# EAGLE board slave-board (EAGLE 8.2.1)
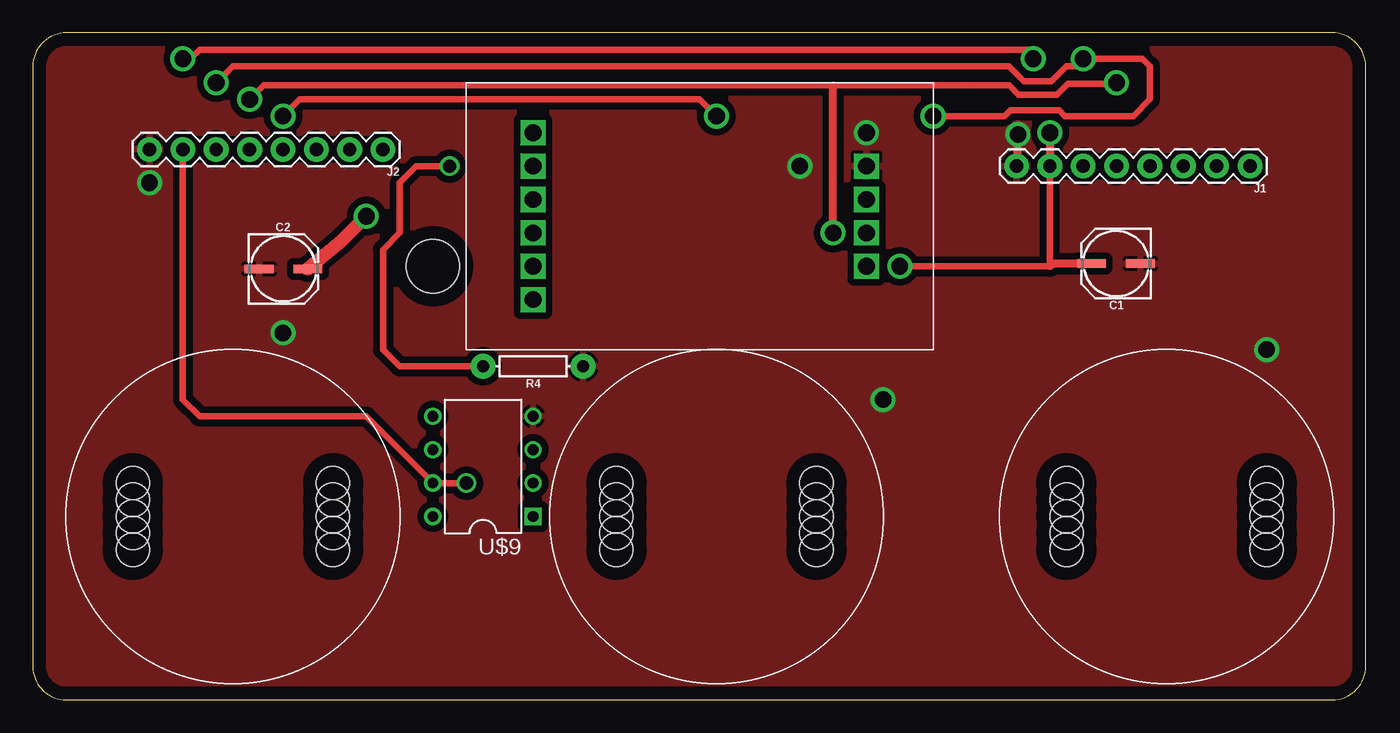
[diagram p0: board, top side]
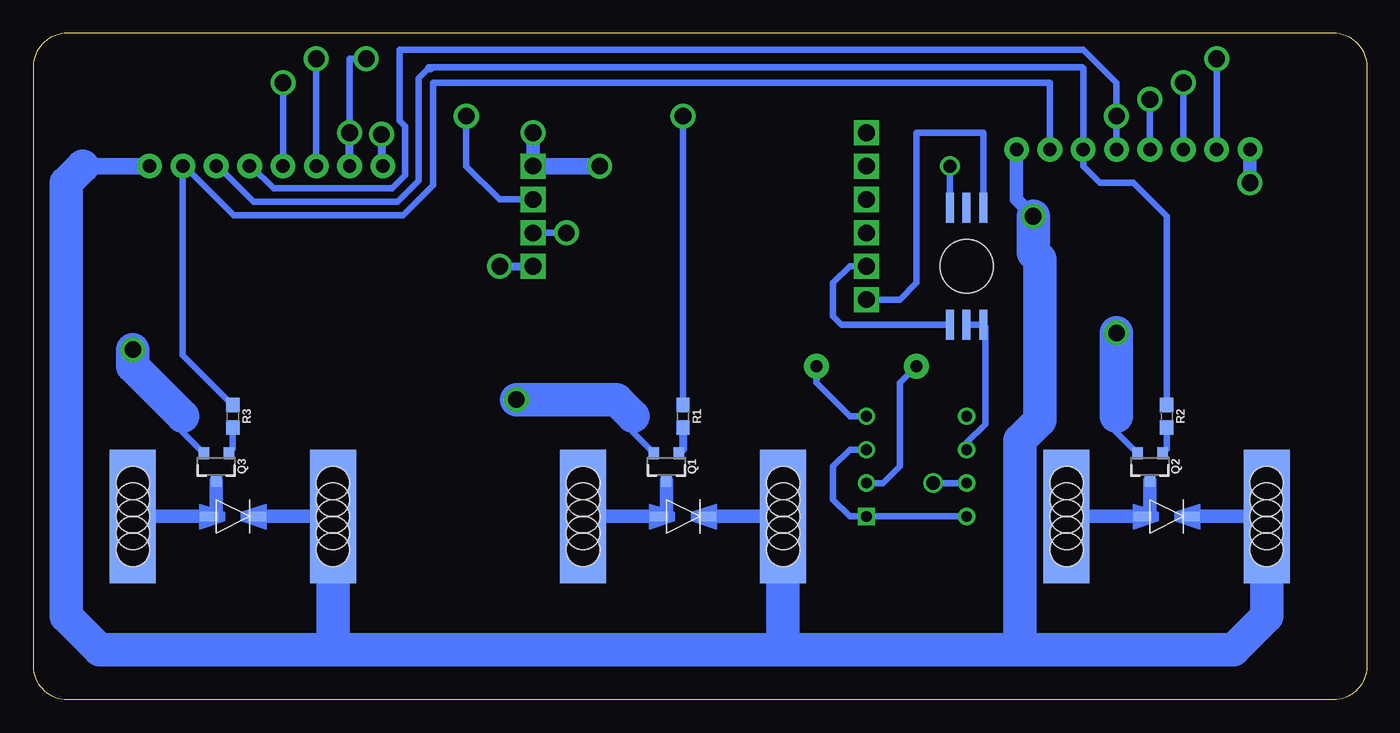
[diagram p1: board, bottom side, seen from below]

Size 101.52 x 50.79 mm. Coordinates in mm from the lower left corner, seen from the top.
Outline: 0,48.25 0,2.54 arc90 2.54,0 98.98,0 arc90 101.52,2.54 101.52,48.25 arc90 98.98,50.79 2.54,50.79 arc90 0,48.25
Copper layers (1*16): Top 0.035mm / dielectric 1.5mm / Bottom 0.035mm
Design rules "default *": minimum track width 6mil, minimum drill 0.35mm, track to track 20mil, track to pad 20mil, pad to pad 20mil, via to via 20mil, smd to smd 20mil, copper to edge 40mil, drill to drill 6mil, minimum pad ring 10mil, minimum via ring 8mil, stop-mask expansion 4mil, vias tented up to drill 0mil, thermal gap 10mil

## Footprints (pad centres in the part's own frame; a part is rotated, then mirrored left to right if it is on the bottom)
PANASONIC_C = smd 2.2 x 0.65: + 1.9,-0.2; - -1.8,-0.2
1X08 = drill 1.016 pad 1.88: 1 0,0; 2 2.54,0; 3 5.08,0; 4 7.62,0; 5 10.16,0; 6 12.7,0; 7 15.24,0; 8 17.78,0
SOT23-3 = smd 0.8 x 0.9: 1 -0.95,-1; 2 0.95,-1; 3 0,1.1
0603 = smd 1.1 x 1: 1 -0.85,0; 2 0.85,0
AXIAL-0.3 = drill 0.9 pad 1.88: P$1 -3.81,0; P$2 3.81,0
HX711 = drill 1.27 square: P$1 -12.7,6.35; P$2 -12.7,3.81; P$3 -12.7,1.27; P$4 -12.7,-1.27; P$5 -12.7,-3.81; P$6 -12.7,-6.35; P$7 12.7,3.81; P$8 12.7,1.27; P$9 12.7,-1.27; P$10 12.7,-3.81
CJV23 = smd 3.5 x 10.16 bottom: P$1 -7.62,0; P$2 7.62,0 | hole 2.54: 7.62,0; 7.62,1.27; 7.62,2.54; 7.62,-1.27; 7.62,-2.54; -7.62,0; -7.62,1.27; -7.62,2.54; -7.62,-1.27; -7.62,-2.54
IN4148 = smd 1.422 x 0.711: P$1 1.829,0; P$2 -1.829,0
2SMPP-03 = smd 2.286 x 0.61 bottom: P$1 4.445,1.27; P$2 4.445,0; P$3 4.445,-1.27; P$4 -4.445,-1.27; P$5 -4.445,0; P$6 -4.445,1.27 | hole 4.064: 0,0
DIP8 = drill 0.813 square: 1 -3.81,-3.81 | drill 0.813: 2 -1.27,-3.81; 3 1.27,-3.81; 4 3.81,-3.81; 5 3.81,3.81; 6 1.27,3.81; 7 -1.27,3.81; 8 -3.81,3.81

## Placement (x,y rotation side)
C1  22uF  [PANASONIC_C]  82.55,33.02 180 top
C2  22uF  [PANASONIC_C]  19.05,33.02 0 top
J1  [1X08]  92.71,40.64 180 top
J2  [1X08]  26.67,41.91 180 top
Q1  600mA/40V  [SOT23-3]  53.34,17.78 180 bottom
Q2  600mA/40V  [SOT23-3]  16.51,17.78 180 bottom
Q3  600mA/40V  [SOT23-3]  87.63,17.78 180 bottom
R1  1k  [0603]  52.07,21.59 270 bottom
R2  1k  [0603]  15.24,21.59 270 bottom
R3  1k  [0603]  86.36,21.59 270 bottom
R4  [AXIAL-0.3]  38.1,25.4 180 top
U$1  HX711  [HX711]  50.8,36.83 0 top
U$2  CJV23-SOLENOID-VALVE  [CJV23]  52.07,13.97 0 top
U$3  CJV23-SOLENOID-VALVE  [CJV23]  15.24,13.97 0 top
U$4  CJV23-SOLENOID-VALVE  [CJV23]  86.36,13.97 0 top
U$5  IN4148  [IN4148]  52.07,13.97 0 bottom
U$6  IN4148  [IN4148]  15.24,13.97 0 bottom
U$7  IN4148  [IN4148]  86.36,13.97 0 bottom
U$8  2SMPP-03  [2SMPP-03]  30.48,33.02 90 top
U$9  LM10CN  [DIP8]  34.29,17.78 90 top

## Library data of the parts
C1 C2 = SparkFun-Capacitors; PROD_ID: CAP-08618
J1 J2 = SparkFun-Connectors; PROD_ID: CONN-08438
Q1-Q3 = SparkFun-DiscreteSemi; PROD_ID: TRANS-08049
R1-R3 = SparkFun-Resistors; PROD_ID: RES-07856
R4 = SparkFun-Resistors
U$1-U$9 = programmable-air-components

## Nets
GND: C1.- C2.- J1.8 J2.8 Q1.2 Q2.2 Q3.2 R4.P$1 U$1.P$7 U$9.4
N$1: Q1.1 R1.2
N$2: Q2.1 R2.2
N$3: Q3.1 R3.2
N$4: U$9.1 U$9.3 U$9.8
N$5: J1.2 J2.2 R3.1
N$7: Q3.3 U$4.P$2 U$7.P$2
N$8: Q2.3 U$3.P$2 U$6.P$2
N$9: Q1.3 U$2.P$2 U$5.P$2
N$10: J1.3 J2.3 R2.1
N$12: J1.4 J2.4 R1.1
N$13: J1.5 J2.5 U$1.P$9
N$14: J1.6 J2.6 U$1.P$8
N$15: C1.+ J1.7 J2.7 U$1.P$10 U$9.7
N$16: U$8.P$5 U$8.P$6 U$9.6
N$17: R4.P$2 U$8.P$3 U$9.2
N$21: U$1.P$6 U$8.P$1
N$22: U$1.P$5 U$8.P$4
VIN: C2.+ J1.1 J2.1 U$2.P$1 U$3.P$1 U$4.P$1 U$5.P$1 U$6.P$1 U$7.P$1

## Tracks (layer width: path | path; a pad name or v marks a point on that pad's centre or on a via)
GND  (via drill 1.27)
  Top 0.61: v75.05,43.06 75.05,40.76 J1.8
  Bottom 0.508: Q2.2 19.05,20.37 19.05,21.59 | Q1.2 55.88,20.37 55.88,21.59 | Q3.2 90.17,20.37 90.17,21.59 | U$9.4 39.37,21.59 41.91,24.13 R4.P$1
  Bottom 0.61: J1.8 75.05,40.76 v75.05,43.06
  Bottom 1.016: v63.5,43.18 U$1.P$7 | v8.89,39.37 J2.8
  Bottom 1.27: U$1.P$7 v58.42,40.64
  Bottom 2.54: 90.17,21.59 93.98,25.4 v93.98,26.67 | 55.88,21.59 57.15,22.86 v64.77,22.86 | 19.05,21.59 v19.05,27.94
  pour Top: 0,50.8 101.6,50.8 101.6,0 0,0
N$1
  Bottom 0.61: R1.2 52.07,19.1 Q1.1
N$2
  Bottom 0.508: R2.2 15.24,19.1 Q2.1
N$3
  Bottom 0.508: R3.2 86.36,19.1 Q3.1
N$4
  Bottom 0.508: U$9.3 39.37,19.05 40.64,17.78 40.64,15.24 39.37,13.97 U$9.1 U$9.8
N$5  (1 unrouted)
  Bottom 0.508: J2.2 24.13,46.99 71.12,46.99 71.12,39.17 73.38,36.91 86.3,36.91 90.04,40.64 | 90.04,40.64 J1.2 | R3.1 90.17,26.25 90.17,40.51 90.04,40.64
N$7
  Bottom 1.016: U$4.P$2 U$7.P$2 87.63,14.53 Q3.3
N$8
  Bottom 1.016: Q2.3 16.51,14.53 U$6.P$2 U$3.P$2
N$9
  Bottom 1.016: Q1.3 53.34,14.53 U$5.P$2 U$2.P$2
N$10
  Bottom 0.508: 71.12,48.18 21.67,48.18 21.59,48.09 J2.3 21.59,40.64 20.32,39.37 17.78,39.37 15.24,36.83 R2.1 | 71.12,48.18 71.46,48.18 | J1.3 87.5,40.64 84.78,37.92 73.8,37.92 72.21,39.51 72.21,47.34 71.54,48.01 71.29,48.01 71.12,48.18
N$12  (via drill 1.27)
  Top 0.508: v52.07,44.45 50.8,45.72 20.32,45.72 v19.05,44.45
  Bottom 0.508: J2.4 v19.05,44.45 19.05,46.99 21.58,49.52 73.66,49.52 73.66,44.09 73.23,43.66 73.23,39.94 74.22,38.94 83.25,38.94 84.96,40.64 J1.4 | v52.07,44.45 R1.1
N$13  (via drill 1.27)
  Top 0.508: v16.51,45.72 17.58,46.79 60.96,46.79 74.37,46.79 75.07,46.09 78.01,46.09 78.82,46.91 82.55,46.91 v82.55,46.99
  Top 0.61: v60.96,35.56 60.96,46.79
  Bottom 0.508: J2.5 v16.51,45.72 | v82.55,46.99 J1.5 | U$1.P$9 v60.96,35.56
N$14  (via drill 1.27)
  Top 0.508: 14.79,47.81 v13.97,46.99 15.24,48.26 74.34,48.26 75.49,47.11 77.59,47.11 78.74,48.26 80.01,48.26 v80.01,48.82 84.53,48.82 85.09,48.26 85.09,45.72 83.82,44.45 78.62,44.45 78.18,44.9 74.46,44.9 74.02,44.45 v68.58,44.45
  Bottom 0.508: J2.6 v13.97,46.99 | v80.01,48.82 J1.6 | v68.58,44.45 68.58,40.64 66.04,38.1 U$1.P$8
N$15  (via drill 1, 1.27)
  Top 0.508: v11.43,48.82 12,48.82 12.7,49.52 76.2,49.52 v76.2,48.82 | v66.04,33.02 77.47,33.02 J1.7 | J2.7 11.43,22.86 12.7,21.59 25.4,21.59 U$9.7 v33.02,16.51
  Top 0.61: C1.+ 77.67,33.22 77.47,33.02 | v77.47,43.18 J1.7
  Bottom 0.508: J2.7 v11.43,48.82 | v76.2,48.82 77.47,48.82 v77.47,43.18 | v33.02,16.51 U$9.7
  Bottom 0.61: 77.47,40.01 J1.7 v77.47,43.18 | v66.04,33.02 U$1.P$10
N$16
  Bottom 0.508: U$8.P$5 U$8.P$6 29.06,28.42 29.06,21 30.48,19.58 U$9.6
N$17  (via drill 1)
  Top 0.508: v31.75,40.64 29.21,40.64 27.94,39.37 27.94,35.56 26.67,34.29 26.67,26.67 27.94,25.4 R4.P$2
  Bottom 0.508: U$9.2 36.83,16.51 35.56,17.78 35.56,24.13 R4.P$2 | U$8.P$3 v31.75,40.64
N$21
  Bottom 0.508: U$8.P$1 29.21,43.18 34.29,43.18 34.29,31.75 35.56,30.48 U$1.P$6
N$22
  Bottom 0.508: U$8.P$4 40.01,28.57 40.64,29.21 40.64,31.75 39.37,33.02 U$1.P$5
VIN  (via drill 1.27)
  Top 1.016: v25.4,36.83 23.49,34.92 C2.+
  Bottom 1.016: U$3.P$1 U$6.P$1 | J2.1 26.67,38.1 v25.4,36.83 | U$4.P$1 U$7.P$1 | U$2.P$1 U$5.P$1
  Bottom 1.27: J1.1 97.79,40.64
  Bottom 2.54: U$3.P$1 7.62,6.35 10.16,3.81 26.67,3.81 | 78.74,3.81 96.52,3.81 99.06,6.35 99.06,39.37 97.79,40.64 | 78.74,3.81 44.45,3.81 | 44.45,3.81 26.67,3.81 | v25.4,36.83 25.4,34.05 24.89,33.54 24.89,21.28 26.42,19.76 26.42,16.51 26.42,4.06 26.67,3.81 | U$2.P$1 44.45,3.81 | U$4.P$1 78.74,3.81